# Altium PCB MAX669 out.PcbDoc
Units mm, origin at the board's own origin, x right, y up, seen from the top; angles counter-clockwise.
Board outline 24.13 x 30.48 mm, 2 copper layers (Top Layer, Bottom Layer); 27 components, 15 nets, 91 pads, 73 vias.
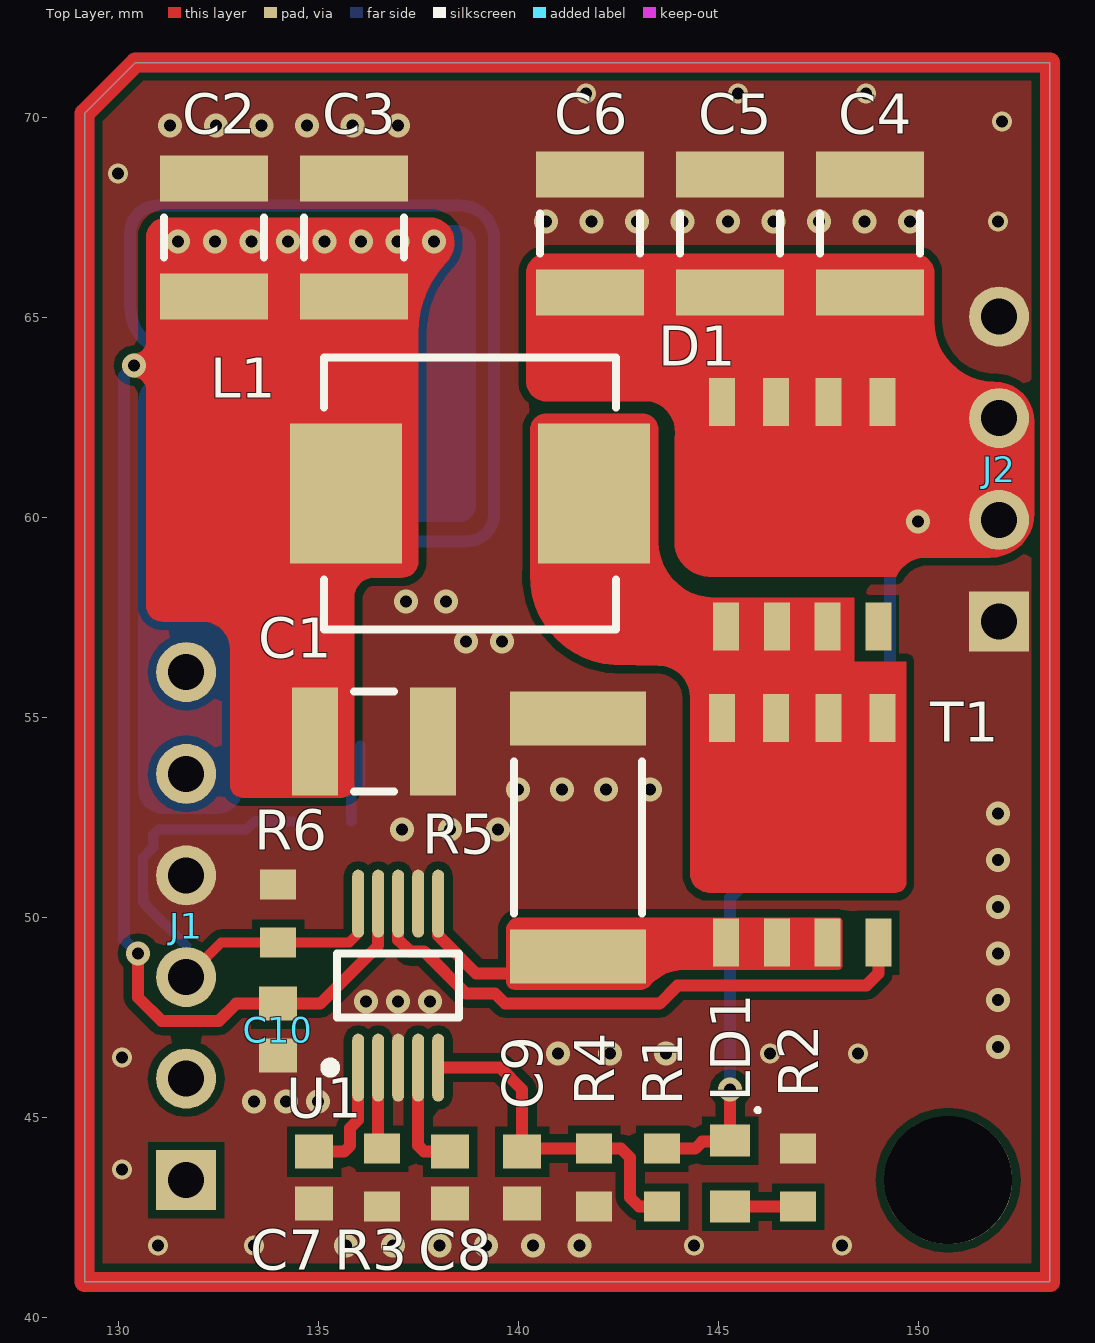
[diagram p0: Top Layer view]
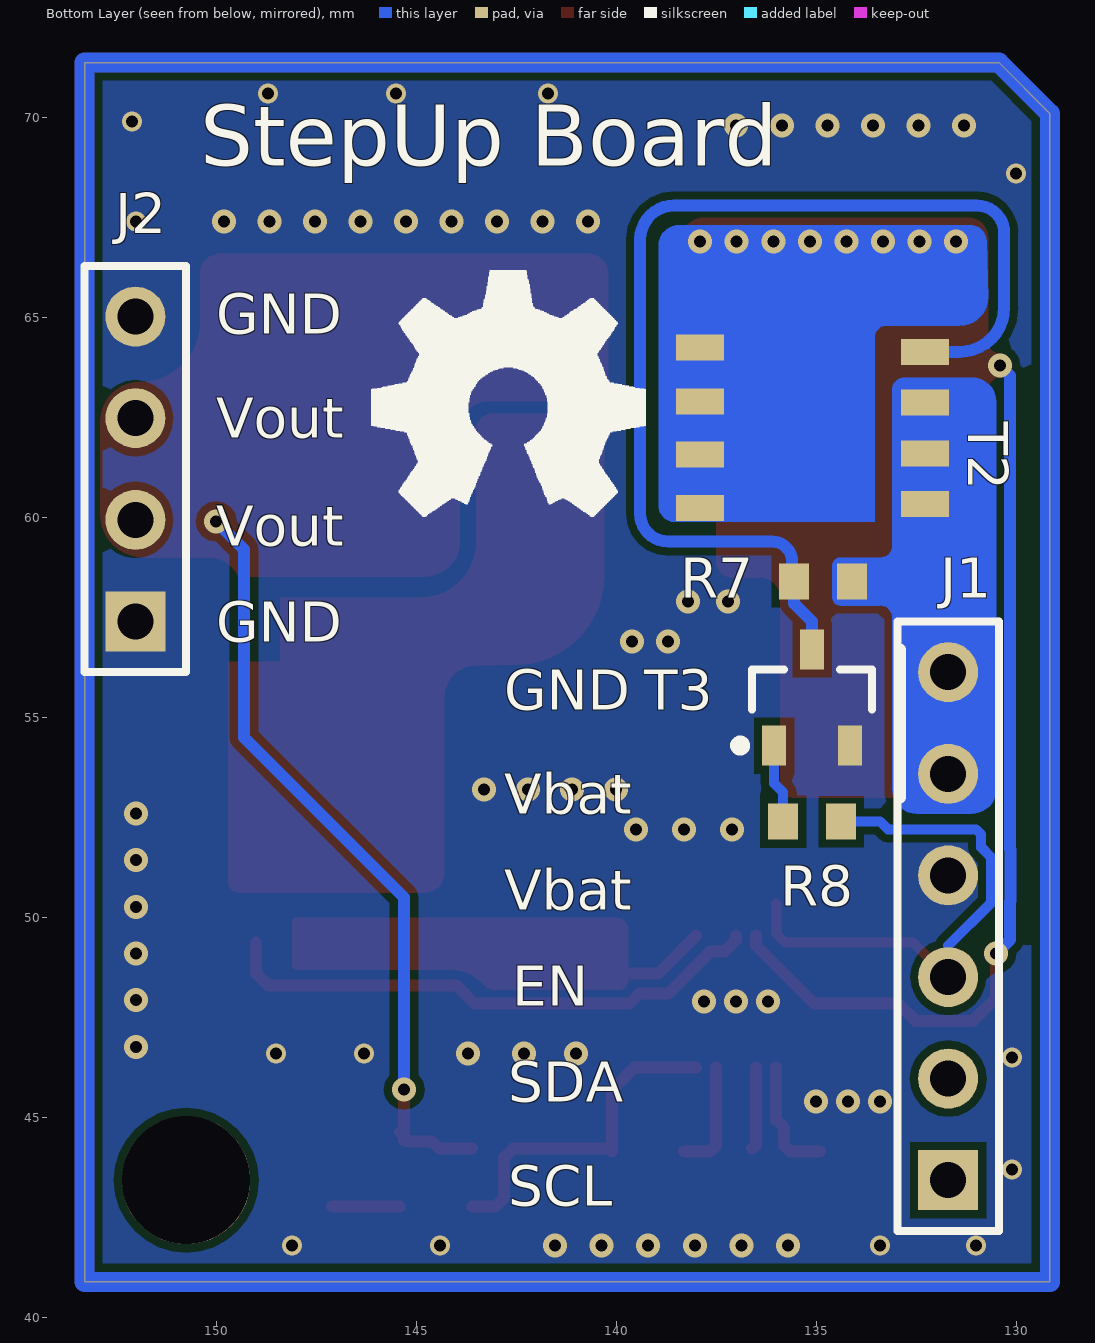
[diagram p1: Bottom Layer view, seen from below]
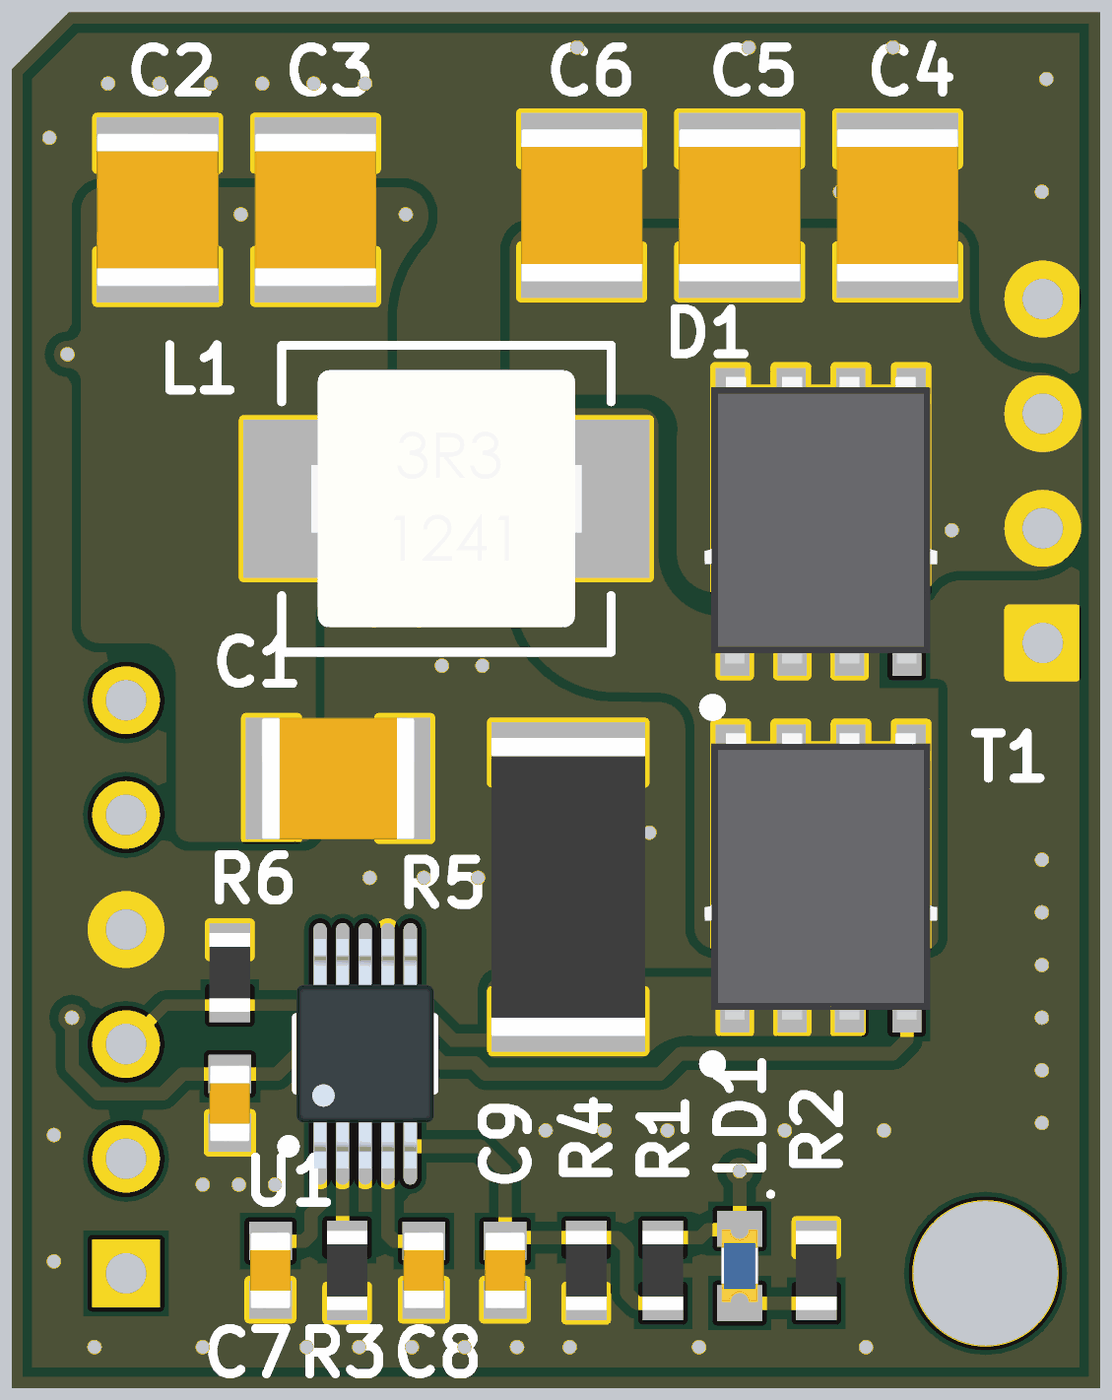
[diagram p2: 3D render of the assembled board from above, using the file's embedded part models]
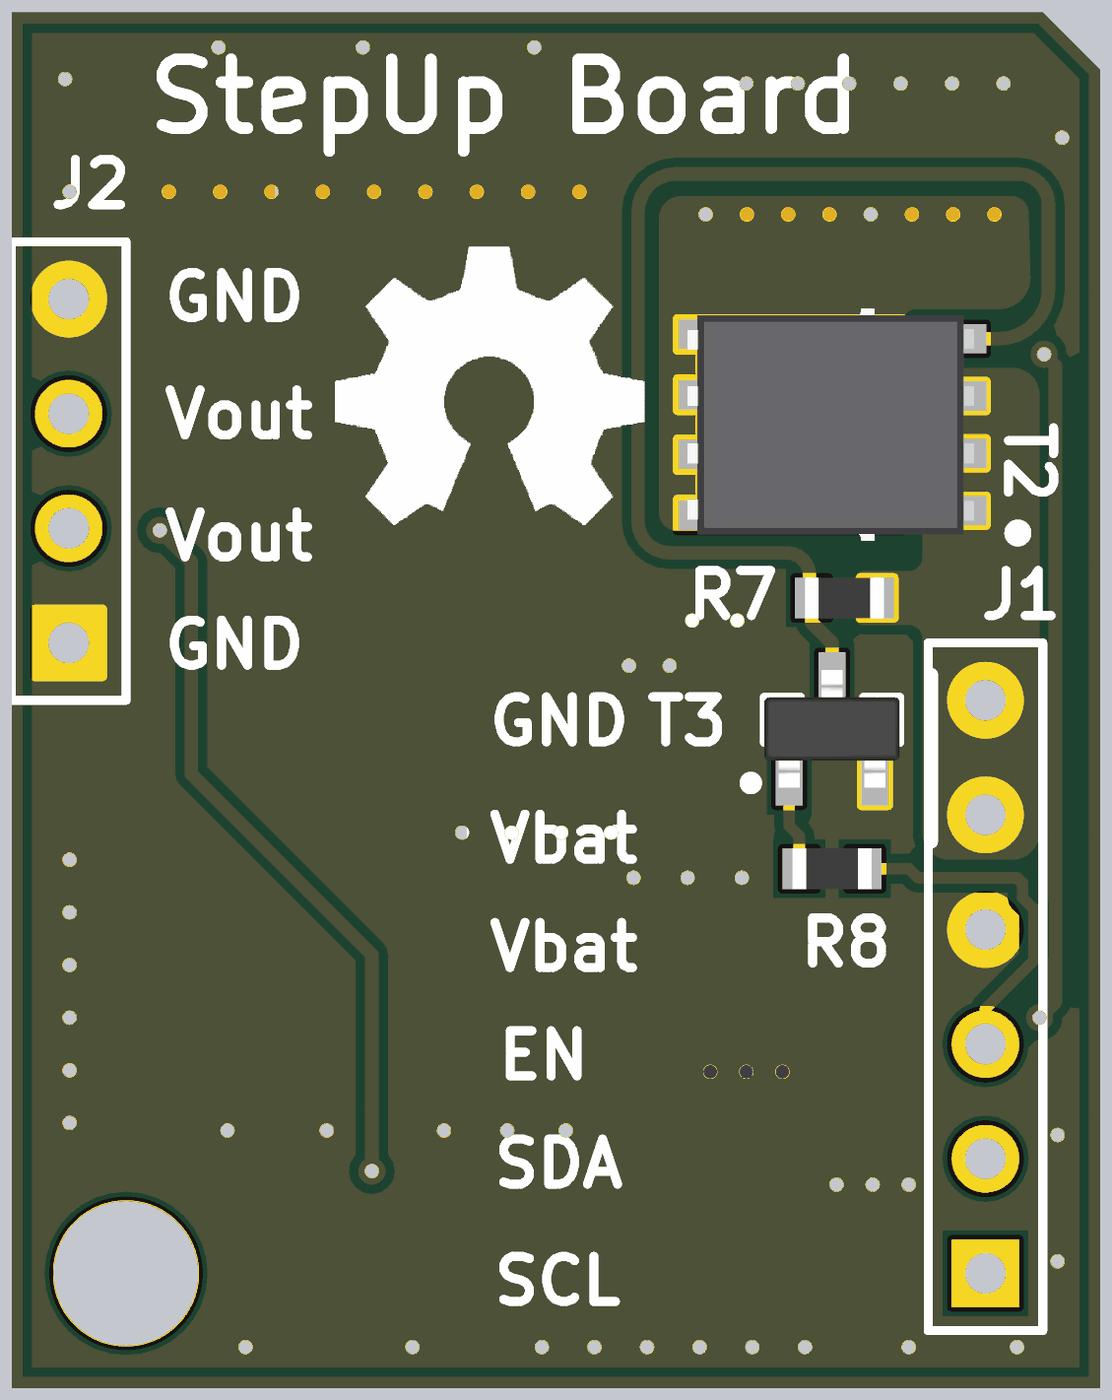
[diagram p3: 3D render of the assembled board from below, using the file's embedded part models]

## Layer stack, top to bottom
Top Solder: solder mask 0.0102, Solder Resist, Dk 3.5
Top Layer: signal copper 0.0356
Dielectric 1: dielectric 0.32, FR-4, Dk 4.8
Bottom Layer: signal copper 0.0356
Bottom Solder: solder mask 0.0102, Solder Resist, Dk 3.5

## Board outline
129.159,40.894 153.289,40.894 153.289,71.374 130.429,71.374 129.159,70.104

## Design rules (kind name [scope] priority, off if disabled: settings)
Clearance [All] p1: gap=0.2 ignorepadtopadclearanceinfootprint=FALSE
PlaneConnect [All] p1: planeconnectstyle=Direct reliefexpansion=0.508 reliefentries=4 reliefconductorwidth=0.254 reliefairgap=0.254
PolygonConnect [All] p1: connectstyle=Direct reliefconductorwidth=0.254 reliefentries=4 polygonreliefangle="90 Angle" airgapwidth=0.254
RoutingVias [All] p1: holewidth=0.3 width=0.6 viastyle="Through Hole" minholewidth=0.3 minwidth=0.6 maxholewidth=1.5 maxwidth=2
SolderMaskExpansion [All] p1: expansion=0.102
Width [All] p1: maxlimit=2 minlimit=0.2 preferedwidth=0.3
29 further rules are at their usual default settings.

## Components (designator, comment, footprint, x,y, rotation, side; value= is the part's Value field where it differs from the comment)
C1 "Capacitor NP" "1210 CAP" 136.4,54.4 r180 top
C2 "Capacitor NP" "1210 CAP" 132.4,67 r270 top
C3 "Capacitor NP" "1210 CAP" 135.9,67 r270 top
C4 "Capacitor NP" "1210 CAP" 148.8,67.1 r270 top
C5 "Capacitor NP" "1210 CAP" 145.3,67.1 r270 top
C6 "Capacitor NP" "1210 CAP" 141.8,67.1 r270 top
C7 "Capacitor NP" "0603 cap" 134.9,43.5 r90 top
C8 "Capacitor NP" "0603 cap" 138.3,43.5 r90 top
C9 "Capacitor NP" "0603 cap" 140.1,43.5 r90 top
C10 "Capacitor NP" "0603 cap" 134,47.2 r90 top
D1 "Diode" "TDSON Diode" 147.1,60.1 r0 top
J1 "Uin" HDR1X6 131.699,43.434 r90 top
J2 "Uout" HDR1X4 152.019,57.404 r90 top
L1 "Inductor" "Inductor 7x7" 138.8,60.6 r0 top
LD1 "LED diode" LED_0603 145.3,43.6 r270 top
R1 "Resistor generic" "0603 RES" 143.6,43.5 r90 top
R2 "Resistor generic" "0603 RES" 147,43.5 r270 top
R3 "Resistor generic" "0603 RES" 136.6,43.5 r90 top
R4 "Resistor generic" "0603 RES" 141.9,43.5 r90 top
R5 "Resistor generic" "2512 RES" 141.5,52 r270 top
R6 "Resistor generic" "0603 RES" 134,50.1 r270 top
R7 "Resistor generic" "0603 RES" 134.825,58.4 r180 bottom
R8 "Resistor generic" "0603 RES" 135.1,52.4 r180 bottom
T1 "MOSFET-N" TDSON-8#1 147.1,52.2 r0 top
T2 "MOSFET-P" TDSON-8#2 135.106,62.24 r90 bottom
T3 "MOSFET-N" SOT23 135.1,55.5 r90 bottom
U1 "MAX669" uMAX_10 137,48.3 r90 top

## Footprints (in the part's own frame and the unit in brackets; to place one, negate y for a bottom-side part, rotate by r counter-clockwise, add the part's x,y. Pads: shape width x height; smd on the part's side, far side on the other; paste and mask are expansions set on the pad)
"0603 cap" [mm]
  rect 0.85x0.95 smd: 1(-0.65,0) 2(0.65,0)
  body extent -0.85,-0.45 0.85,0.45, height 0.8
"0603 RES" [mm] "RES0603 medium"
  rect 0.75x0.9 smd: 1(-0.725,0) 2(0.725,0)
  body extent -0.87,-0.45 0.87,0.45, height 0.4
"1210 CAP" [mm] "1210cap high"
  rect 1.15x2.7 smd: 1(-1.475,0) 2(1.475,0)
  silkscreen extent -0.5,-1.25 0.5,1.25, body extent -1.7,-1.35 1.7,1.35, height 2
"2512 RES" [mm] "2512 RES med"
  rect 1.35x3.4 smd: 1(-2.975,0) 2(2.975,0)
  silkscreen extent -1.9,-1.6 1.9,1.6, body extent -3.3,-1.7 3.3,1.7, height 0.6
HDR1X4 [mm] "Connector; Header; 4 Position"
  rect 1.5x1.5 hole 0.9: 1(0,0)
  round 1.5 hole 0.9: 2(2.54,0) 3(5.08,0) 4(7.62,0)
HDR1X6 [mm] "Connector; Header; 6 Position"
  rect 1.5x1.5 hole 0.9: 1(0,0)
  round 1.5 hole 0.9: 2(2.54,0) 3(5.08,0) 4(7.62,0) 5(10.16,0) 6(12.7,0)
"Inductor 7x7" [mm] "Molded Inductor, 2-Leads, Body 7,30x6,70mm, IPC Medium Density MGV0605"
  rect 2.8x3.5 smd: 1(-3.1,0) 2(3.1,0)
  silkscreen extent -3.65,-3.4 3.65,3.4, body extent -3,-2.85 3,2.85, height 2.65
LED_0603 [mm] "LED diode 0603"
  rect 0.8x1 smd: 1(-0.825,0) 2(0.825,0)
  silkscreen extent -1.64,0.64 -1.54,0.74, body extent -0.8,-0.4 0.8,0.4, height 0.6
SOT23 [mm] "SOT23, 3-Leads, Body 2,90x2,45mm, Pitch 0,95mm, IPC Medium Density"
  rect 1x0.6 smd: 1(-1.2,0.95) 2(-1.2,-0.95) 3(1.2,0)
  silkscreen extent -1.32,-1.5 0.7,1.93, body extent -1.3,-1.5 1.3,1.5, height 1.1
"TDSON Diode" [mm] "Schottky Diode TDSON8"
  rect 0.65x1.2 smd: 1(-1.905,-2.825) 1(-0.635,-2.825) 1(0.635,-2.825) 1(1.905,-2.825) 2(-2.007,2.794) 2(-0.66,2.794) 2(0.66,2.794) 2(2.007,2.794)
  round 0.6 on Top Overlay: ""(-2.4,-4.125)
  Top Layer region: -2.35,2.925 -2.35,-1.575 2.35,-1.575 2.35,2.925
  Top Layer region: -2.35,2.925 -1.65,2.925 -1.65,3.425 -2.35,3.425
  Top Layer region: 1.65,2.925 2.35,2.925 2.35,3.425 1.65,3.425
  Top Layer region: -1.015,2.925 -0.315,2.925 -0.315,3.425 -1.015,3.425
  Top Layer region: 0.315,2.925 1.015,2.925 1.015,3.425 0.315,3.425
  body extent -2.58,-3.15 2.57,3.2, height 1.1
TDSON-8#1 [mm] "Mosfet TDSON 8-pin"
  rect 0.65x1.2 smd: 1(-1.905,-2.825) 1(-0.635,-2.825) 1(0.635,-2.825) 2(1.905,-2.825) 3(-2.007,2.794) 3(-0.66,2.794) 3(0.66,2.794) 3(2.007,2.794)
  round 0.6 on Top Overlay: ""(-2.4,-4.125)
  Top Layer region: 0.315,2.925 1.015,2.925 1.015,3.425 0.315,3.425
  Top Layer region: -1.015,2.925 -0.315,2.925 -0.315,3.425 -1.015,3.425
  Top Layer region: 1.65,2.925 2.35,2.925 2.35,3.425 1.65,3.425
  Top Layer region: -2.35,2.925 -1.65,2.925 -1.65,3.425 -2.35,3.425
  Top Layer region: -2.35,2.925 -2.35,-1.575 2.35,-1.575 2.35,2.925
  body extent -2.58,-3.15 2.57,3.2, height 1.1
TDSON-8#2 [mm] "Mosfet TDSON 8-pin"
  rect 0.65x1.2 smd: 1(-1.905,-2.825) 1(-0.635,-2.825) 1(0.635,-2.825) 2(1.905,-2.825) 3(-2.007,2.794) 3(-0.66,2.794) 3(0.66,2.794) 3(2.007,2.794)
  round 0.6 on Bottom Overlay: ""(-2.4,-4.125)
  Top Layer region: 0.315,2.925 1.015,2.925 1.015,3.425 0.315,3.425
  Top Layer region: -1.015,2.925 -0.315,2.925 -0.315,3.425 -1.015,3.425
  Top Layer region: 1.65,2.925 2.35,2.925 2.35,3.425 1.65,3.425
  Top Layer region: -2.35,2.925 -1.65,2.925 -1.65,3.425 -2.35,3.425
  Top Layer region: -2.35,2.925 -2.35,-1.575 2.35,-1.575 2.35,2.925
  body extent -2.58,-3.15 2.57,3.2, height 1.1
uMAX_10 [mm] "uMAX 10pin MAX669"
  oval 1.7x0.3 smd: 1(-2.05,1) 2(-2.05,0.5) 3(-2.05,0) 4(-2.05,-0.5) 5(-2.05,-1) 6(2.05,-1) 7(2.05,-0.5) 8(2.05,0) 9(2.05,0.5) 10(2.05,1)
  silkscreen extent -2.17,-1.52 0.8,1.82, body extent -2.54,-1.53 2.54,1.52, height 1.1

## Part data
D1: "NRVTS1245EMFST1G", Valve=NRVTS1245EMFST1G
J1: library part "Header 6", "Header, 6-Pin", LatestRevisionDate=17-Jul-2002, LatestRevisionNote="Re-released for DXP Platform.", Publisher="Altium Limited"
J2: library part "Header 4", "Header, 4-Pin", LatestRevisionDate=17-Jul-2002, LatestRevisionNote="Re-released for DXP Platform.", Publisher="Altium Limited"
L1: "Single coil", Supplier Part Number 1=2530091, Supplier 1=Farnell
LD1: "LED"
R1 R2 R3 R4 R5 R6 R7 R8: library part Resistor, "Resistor SMD"
  R1: Valve=220k
  R2: Valve=1k5
  R3 R6 R7: Valve=100k
  R4: Valve=12k
  R8: Valve=150R
T1 T3: "MOSFET N"
  T1: Valve=SI7157DP-T1-GE3
  T3: Valve=2N7002
T2: "MOSFET P"
U1: "PWM Step-Up Controller"
C1 C2 C3 C4 C5 C6: Valve=22uF
C7: Valve=1uF
C8 C9: Valve=220nF
C10: Valve=100nF

## Free pads (board coordinates)
  round 3.2 hole 3.2: 11(150.749,43.434)

## Via types
v1: diameter 0.6, hole 0.3, Top Layer to Bottom Layer, tented both sides, 59 vias
v2: diameter 0.5, hole 0.3, Top Layer to Bottom Layer, tented both sides, 14 vias

## Nets (pads, with @x,y where several pads share a name; then routed paths per layer and width w, separated by ;. In a path a pad name is that pad's centre, name@x,y a point inside that pad or via, vN(x,y) a via of type N, cw(c..) or ccw(c..) an arc to the next point about the centre after c; other vN are vias at no path point)
GND: C1.1 C2.1 C3.1 C4.1 C5.1 C6.1 C7.1 C8.1 C9.1 C10.1 J1.4 J2.1 J2.4 R2.1 R3.1 R4.1 R5.1 R6.1 T3.2 U1.3 U1.7
  other v1: 135.7,41.8 136.867,41.8 138.033,41.8 139.2,41.8 140.367,41.8 141.533,41.8 133.4,45.4 134.2,45.4 135,45.4 141,46.6 142.3,46.6 143.7,46.6 152,46.767 136.2,47.9 137,47.9 137.8,47.9 152,47.933 152,49.1 152,50.267 152,51.433 137.1,52.2 138.3,52.2 139.5,52.2 152,52.6 140,53.2 141.1,53.2 142.2,53.2 143.3,53.2 138.7,56.9 139.6,56.9 137.2,57.9 138.2,57.9 140.7,67.4 141.837,67.4 142.975,67.4 144.112,67.4 145.25,67.4 146.387,67.4 147.525,67.4 148.662,67.4 149.8,67.4 131.3,69.8 132.44,69.8 133.58,69.8 134.72,69.8 135.86,69.8 137,69.8
  other v2: 131,41.8 133.4,41.8 144.4,41.8 148.1,41.8 130.1,43.7 130.1,46.5 146.3,46.6 148.5,46.6 152,67.4 130,68.6 152.1,69.9 141.7,70.6 145.5,70.6 148.7,70.6
NetC7_2: C7.2 U1.1 | length 3
  Top Layer w0.3: C7.2 135.65,44.15 135.8,44.3 135.8,44.745 136,44.945 U1.1
NetC8_2: C8.2 U1.4 | length 2.8
  Top Layer w0.3: U1.4 137.5,44.3 137.65,44.15 C8.2
NetC9_2: C9.2 R1.1 R4.2 U1.5 | length 8.6
  Top Layer w0.3: U1.5 139.55,46.25 140.1,45.7 C9.2 140.175,44.225 R4.2 142.575,44.225 142.8,44 142.8,43 143.025,42.775 R1.1
NetD1_1: D1.1@145.195,57.275 D1.1@146.465,57.275 D1.1@147.735,57.275 L1.2 T1.3
NetJ1_3: J1.3 R6.2 R8.2 U1.10 | length 13.2
  Top Layer w0.254: J1.3 131.714,48.514 132.575,49.375 R6.2 135.775,49.375 136,49.6 U1.10
  Bottom Layer w0.254: J1.3 131.699,49.301 130.627,50.373 130.627,50.603 130.622,50.608 130.622,51.5 130.877,51.755 130.877,52.077 131,52.2 133.2,52.2 133.4,52.4 R8.2
NetJ1_5: J1.5 J1.6 R7.2 T2.1
NetLD1_2: LD1.2 R2.2 | length 1.7
  Top Layer w0.3: LD1.2@145.4,42.775 R2.2 R2.2@147.1,42.775
NetR3_2: R3.2 U1.2 | length 2.1
  Top Layer w0.3: U1.2 136.5,44.325 R3.2
NetR5_2: R5.2 T1.1 U1.6 | length 4.1
  Top Layer w0.3: U1.6@138,49.55 138.95,48.6 141.075,48.6 R5.2
NetR7_1: R7.1 T2.2 T3.3 | length 28.2
  Bottom Layer w0.3: T2.2 131.407,64.145 cw(c131.407,65.252) 130.3,65.252 130.3,67.117 cw(c130.983,67.117) 130.983,67.8 138.554,67.8 cw(c138.554,66.954) 139.4,66.954 139.4,60.1 cw(c138.7,60.1) 138.7,59.4 136.1,59.4 ccw(c136.1,58.9) 135.6,58.9 135.6,58.45 cw(c135.55,58.45) R7.1 135.55,57.85 135.1,57.4 T3.3
NetR8_1: R8.1 T3.1 | length 2
  Bottom Layer w0.254: R8.1 135.825,53.125 136.05,53.35 T3.1
NetT1_2: T1.2 U1.8 | length 13.9
  Top Layer w0.3: U1.8@137,49.55 137,49.443 137.293,49.15 137.65,49.15 138.7,48.1 139.422,48.1 139.672,47.85 143.534,47.85 143.984,48.301 148.701,48.301 149.005,48.605 T1.2
Vbat: C1.2 C2.2 C3.2 C10.2 L1.1 T2.3 U1.9 | length 23.3
  Top Layer w0.3: v1(130.5,49.1) 130.5,48 131.086,47.414 132.514,47.414 132.95,47.85 C10.2 135.05,47.85 136.5,49.3 U1.9@136.5,49.55
  Bottom Layer w0.3: v1(130.4,63.8) 130.15,63.55 130.15,51.703 130.145,51.698 130.145,50.41 130.15,50.405 130.15,49.45 v1(130.5,49.1)
  other v1: 131.5,66.9 132.414,66.9 133.329,66.9 134.243,66.9 135.157,66.9 136.071,66.9 136.986,66.9 137.9,66.9
Vout: C4.2 C5.2 C6.2 D1.2 J2.2 J2.3 LD1.1 R1.2 | length 20
  Top Layer w0.3: R1.2 144.425,44.225 144.6,44.4 145.175,44.4 LD1.1@145.3,44.525 ; LD1.1 LD1.1@145.3,44.525 ; v1(145.3,45.7) LD1.1@145.3,44.525 ; LD1.1@145.4,44.625 LD1.1@145.3,44.525 ; v1(150,59.9) 150.2,59.9 150.5,59.6
  Bottom Layer w0.3: v1(145.3,45.7) 145.3,50.5 149.3,54.5 149.3,59.2 v1(150,59.9)
pads on no net: D1. D1.1@149.005,57.275 J1.1 J1.2 T1. T2.

## Polygon pours and split planes (outlines as drawn)
GND on Top Layer "GND" (solid, remove dead copper, pour order 0): 129.159,40.894 153.289,40.894 153.289,71.374 130.429,71.374 129.159,70.104
GND on Bottom Layer "GND" (solid, remove dead copper, pour order 1): 129.159,40.894 153.289,40.894 153.289,71.374 130.429,71.374 129.159,70.104

## Other copper
Top Layer:
  region net Vbat: 130.4,63.5 cw(c130.4,63.2) 130.7,63.2 130.7,57.8 ccw(c131.1,57.8) 131.1,57.4 132.1,57.4 cw(c132.1,56.7) 132.8,56.7 132.8,53.3 ccw(c133.1,53.3) 133.1,53 135.6,53 ccw(c135.6,53.3) 135.9,53.3 135.9,58 cw(c136.4,58) 136.4,58.5 137.1,58.5 ccw(c137.1,58.9) 137.5,58.9 137.5,59.099 137.5,64.581 cw(c139.601,64.835) 137.497,64.61 cw(c140.034,64.61) 138.18,66.343 ccw(c137.611,66.898) 138.4,66.801 138.4,66.9 ccw(c137.8,66.9) 137.8,67.5 131.2,67.5 ccw(c131.2,67) 130.7,67 130.7,64.4 cw(c130.4,64.4) 130.4,64.1 ccw(c130.432,63.768) 130.1,63.8 ccw(c130.432,63.832)
  region net NetD1_1: 143.5,56.3 cw(c143.5,55.5) 144.3,55.5 144.3,51.1 ccw(c144.775,51.1) 144.775,50.625 149.45,50.625 ccw(c149.45,50.875) 149.7,50.875 149.7,56.4 148.4,56.4 148.4,58 144.9,58 cw(c144.9,59.4) 143.5,59.4 143.5,62.2 ccw(c143.1,62.2) 143.1,62.6 140.7,62.6 ccw(c140.7,62.2) 140.3,62.2 140.3,58.7 ccw(c142.535,58.551) 140.295,58.551 ccw(c142.536,58.551) 142.388,56.315
  region net NetR5_2: 148,50 140,50 ccw(c140,49.7) 139.7,49.7 139.7,48.4 ccw(c139.9,48.4) 139.9,48.2 143.1,48.2 ccw(c142.95,48.75) 143.245,48.262 cw(c144.193,47.46) 144.267,48.7 148,48.7 ccw(c148,48.8) 148.1,48.8 148.1,49.9 ccw(c148,49.9)
  region net Vout: 143.908,59.392 143.907,61.992 ccw(c143.149,62.145) 143.299,62.904 140.709,62.904 cw(c140.709,63.416) 140.2,63.361 140.2,66.1 cw(c140.7,66.1) 140.7,66.6 149.9,66.6 cw(c149.9,66.1) 150.4,66.1 150.4,64.9 ccw(c151.9,64.9) 151.9,63.4 cw(c151.9,62.4) 152.9,62.4 152.9,60.105 cw(c151.803,60.097) 151.803,59 150.2,59 ccw(c150.2,58.171) 149.45,58.525 144.775,58.525 cw(c144.775,59.392)
Bottom Layer:
  region net Vbat: 133.538,64.409 133.538,64.491 ccw(c133.229,64.491) 133.229,64.8 131.4,64.8 cw(c131.4,65.5) 130.7,65.5 130.738,66.909 cw(c131.138,66.909) 131.138,67.309 138.438,67.309 cw(c138.438,66.809) 138.938,66.809 138.938,60.325 cw(c138.53,60.298) 138.557,59.89 133.538,59.89
  region net NetJ1_5: 132.5,52.6 ccw(c132.5,53.2) 133.1,53.2 133.1,57.5 cw(c133.4,57.5) 133.4,57.8 134.4,57.8 ccw(c134.4,58) 134.6,58 134.6,58.8 ccw(c134.4,58.8) 134.4,59 133.4,59 cw(c133.4,59.3) 133.1,59.3 133.1,63.2 ccw(c132.8,63.2) 132.8,63.5 131.1,63.5 ccw(c131.1,62.9) 130.5,62.9 130.5,53.2 ccw(c131.1,53.2) 131.1,52.6
Multi-Layer:
  the board outline again, w0.5

## Silkscreen, mask and mechanical layers (free items; w line width, h text height)
Bottom Overlay:
  drawing of 2 lines, arcs and shapes, not listed
  text "StepUp Board" at 150.4,68.8 h1.52
  text "GND" at 150,64.6 h1
  text "Vout" at 150,62 h1
  text "Vout" at 150,59.3 h1
  text "GND" at 150,56.9 h1
  text "GND" at 142.8,55.2 h1
  text "Vbat" at 142.8,52.6 h1
  text "Vbat" at 142.8,50.2 h1
  text "EN" at 142.6,47.8 h1
  text "SDA" at 142.7,45.4 h1
  text "SCL" at 142.7,42.8 h1